# EAGLE board HV_SNS_V0.1 (EAGLE 9.6.2)

Size 160 x 100 mm. Coordinates in mm from the lower left corner, seen from the top.
Outline: 0,0 160,0 160,100 0,100 0,0
Copper layers (1*16): Top 0.035mm / dielectric 1.5mm / Bottom 0.035mm
Design rules "default": minimum track width 8mil, minimum drill 0.35mm, track to track 6mil, track to pad 6mil, pad to pad 6mil, via to via 6mil, smd to smd 6mil, copper to edge 40mil, drill to drill 6mil, minimum pad ring 10mil, minimum via ring 8mil, stop-mask expansion 4mil, vias tented up to drill 15mil, thermal gap 10mil

## Footprints (pad centres in the part's own frame; a part is rotated, then mirrored left to right if it is on the bottom)
C0805 = smd 1.3 x 1.5: 1 -0.95,0; 2 0.95,0
DO-41 = drill 1: A 4.325,0 | drill 1 square: C -4.325,0
DO35Z10 = drill 0.813 long: A 5.08,0; C -5.08,0
SMT-JUMPER_2_NC_PASTE_SILK = smd 0.635 x 1.27: 1 -0.406,0; 2 0.406,0
LED5MM = drill 0.813 pad 1.676 octagon: A -1.27,0; K 1.27,0
CHIP-LED0805 = smd 1.2 x 1.2: A 0,-1.05; C 0,1.05
DIL04 = drill 0.813 offset: 1 -1.27,-3.81; 2 1.27,-3.81; 3 1.27,3.81; 4 -1.27,3.81
SOT23 = smd 1 x 1.4: 1 -0.95,-1.1; 2 0.95,-1.1; 3 0,1.1
R0805 = smd 1.3 x 1.5: 1 -0.95,0; 2 0.95,0
0207/10 = drill 0.813 octagon: 1 -5.08,0; 2 5.08,0
RTRIM3296W = drill 0.61: 1 0,-2.54; 2 0,0; 3 0,2.54
PMX42_DPAK = smd 1.6 x 2.997: 1 -2.261,-4.928; 3 2.21,-4.928 | smd 5.452 x 7: 4 0,1.853
SO-8 = smd 1.524 x 0.61: 1 -2.743,1.905; 2 -2.743,0.635; 3 -2.743,-0.635; 4 -2.743,-1.905; 5 2.743,-1.905; 6 2.743,-0.635; 7 2.743,0.635; 8 2.743,1.905
PHOENIX_MKDS1/2-3.81 = drill 1.1 octagon: 1 -1.906,-0.05; 2 1.904,-0.05

## Placement (x,y rotation side)
C10  1u  [C0805]  43.94,86.74 180 top
C50  1u  [C0805]  86.36,95.25 180 top
D3  1N4007  [DO-41]  26.42,79.38 0 top
D4  1N4007  [DO-41]  26.42,90.42 0 top
D20  BZX55  [DO35Z10]  26.67,54.61 180 top
D21  BZX55  [DO35Z10]  40.64,54.61 180 top
D90  BZX55  [DO35Z10]  -34.29,64.77 0 top  (outside the outline)
D91  BZX55  [DO35Z10]  -48.26,64.77 0 top  (outside the outline)
JP70  JUMPER-SMT_2_NC_PASTE_SILK  [SMT-JUMPER_2_NC_PASTE_SILK]  -57.15,82.55 0 top  (outside the outline)
JP80  JUMPER-SMT_2_NC_PASTE_SILK  [SMT-JUMPER_2_NC_PASTE_SILK]  -71.12,82.55 0 top  (outside the outline)
LED20  [LED5MM]  52.07,55.88 270 top
LED21  [LED5MM]  59.69,55.88 270 top
LED22  [LED5MM]  67.31,55.88 270 top
LED23  [LED5MM]  74.93,55.88 270 top
LED100  [CHIP-LED0805]  -26.67,46.99 0 top  (outside the outline)
OK60  PC817  [DIL04]  105.54,85.72 270 top
OK90  PC817  [DIL04]  105.41,71.12 270 top
Q60  SI2302  [SOT23]  121.28,86.11 270 top
Q70  SI2302  [SOT23]  -52.07,58.42 0 top  (outside the outline)
Q80  SI2302  [SOT23]  -59.69,58.42 0 top  (outside the outline)
Q90  SI2302  [SOT23]  -67.31,58.42 0 top  (outside the outline)
R10  18K2  [R0805]  37.21,83.19 0 top
R11  6K04  [R0805]  43.94,83.19 0 top
R20  12K  [0207/10]  25.91,67.94 0 top
R21  12K  [0207/10]  39.37,67.94 0 top
R22  3K  [0207/10]  52.83,67.94 0 top
R40  400K  [0207/10]  60.96,93.98 0 top
R41  4K7  [0207/10]  60.96,88.9 0 top
R42  1K  [RTRIM3296W]  71.63,91.44 180 top
R43  400K  [0207/10]  61.09,83.19 0 top
R44  4K7  [0207/10]  61.21,78.11 0 top
R45  1K  [RTRIM3296W]  71.63,80.64 180 top
R60  480E  [R0805]  93.85,87 180 top
R61  10K  [R0805]  115.44,88.01 90 top
R70  10K  [R0805]  -22.86,71.12 0 top  (outside the outline)
R80  10K  [R0805]  -29.21,71.12 0 top  (outside the outline)
R90  12K  [0207/10]  26.67,72.39 0 top
R91  12K  [0207/10]  39.37,72.39 0 top
R92  12K  [0207/10]  52.07,72.39 0 top
R93  10K  [R0805]  -35.56,71.12 0 top  (outside the outline)
R100  1K8  [R0805]  -59.69,64.77 0 top  (outside the outline)
U10  LR8K4-G  [PMX42_DPAK]  43.05,91.95 270 top
U50  OPA735AID.  [SO-8]  86.36,87.63 0 top
XA1  MKDS1/2-3.81  [PHOENIX_MKDS1/2-3.81]  12.7,7.62 270 top
XA2  MKDS1/2-3.81  [PHOENIX_MKDS1/2-3.81]  12.83,92.33 270 top
XA3  MKDS1/2-3.81  [PHOENIX_MKDS1/2-3.81]  12.7,81.28 270 top
XA4  MKDS1/2-3.81  [PHOENIX_MKDS1/2-3.81]  12.7,69.85 270 top
XA5  MKDS1/2-3.81  [PHOENIX_MKDS1/2-3.81]  12.7,57.15 270 top
XA6  MKDS1/2-3.81  [PHOENIX_MKDS1/2-3.81]  12.7,33.02 270 top
XA7  MKDS1/2-3.81  [PHOENIX_MKDS1/2-3.81]  12.7,20.32 270 top
XA8  MKDS1/2-3.81  [PHOENIX_MKDS1/2-3.81]  -49.53,22.86 0 top  (outside the outline)
XA9  MKDS1/2-3.81  [PHOENIX_MKDS1/2-3.81]  -63.5,22.86 0 top  (outside the outline)
XA10  MKDS1/2-3.81  [PHOENIX_MKDS1/2-3.81]  -77.47,22.86 0 top  (outside the outline)
XA11  MKDS1/2-3.81  [PHOENIX_MKDS1/2-3.81]  -21.59,38.1 0 top  (outside the outline)

## Library data of the parts
C10 C50 = rcl; SPICEPREFIX: C
D3 D4 = Diodes; CREATED_BY: PCBLayout.com; DIGIKEY_PART_NUMBER: 1N4007MSCT-ND; MANUFACTURER: Micro Commercial Co; MPN: 1N4007; PACKAGE: DO-41
D20 D21 D90 D91 = diode
JP70 JP80 = SparkFun-Jumpers
LED20-LED23 = adafruit
LED100 = led
OK60 OK90 = optocoupler; MPN: PC817X4J000F; OC_FARNELL: 9707727; OC_NEWARK: 97K7059
Q60 Q70 Q80 Q90 = SI230x; AVAILABILITY: Unavailable; DESCRIPTION: N-Channel 20V 2.6A _Ta_ 710mW _Ta_ Surface Mount SOT-23-3 _TO-236_; MF: Vishay Siliconix; MP: SI2302; PACKAGE: SOT-23-3 Vishay Siliconix; PRICE: None
R10 R11 R20-R22 R40 R41 R43 R44 R60 R61 R70 R80 R90-R93 R100 = rcl; SPICEPREFIX: R
R42 R45 = rcl; SPICEMODEL: X; SPICEPREFIXL: POT
U10 = LR8K4-G
U50 = OPA735AID
XA1-XA11 = MKDS1_2-3.81; AVAILABILITY: Unavailable; DESCRIPTION: 12 Position Wire to Board Terminal Block Horizontal with Board 0.150 (3.81mm) Through Hole; MF: Phoenix Contact; MP: MKDS 1/ 2-3.81; PACKAGE: None; PRICE: None

## Nets
AIR_N_AUX1: Q80.1 R80.1 XA7.1
AIR_N_AUX2: JP80.1 XA7.2
AIR_N_LINE: XA5.1
AIR_N_LOAD: D20.A D90.A XA5.2
AIR_N_STATUS: Q80.3 XA11.1
AIR_P_AUX1: Q70.1 R70.1 XA6.1
AIR_P_AUX2: JP70.1 XA6.2
AIR_P_LINE: XA4.1
AIR_P_LOAD: R20.1 R90.1 XA4.2
AIR_P_STATUS: Q70.3 XA10.1
B+: R40.1 U10.1 XA2.1
B-: D4.C R41.1 XA2.2
B_OPAMP: R42.2 U50.3
CMP_OUT: R60.2 U50.6
GND: JP70.2 JP80.2 LED100.C OK60.3 OK90.3 Q60.2 Q70.2 Q80.2 Q90.2 XA1.2 XA9.2 XA10.2 XA11.2
GND-ISO: C50.2 D3.A D4.A OK60.2 R10.1 U50.4
HV_IND_SINK: Q90.3 XA8.2
LR8_REF: C10.2 R10.2 R11.1 U10.3
MC95B_STATUS: Q60.3 XA9.1
MC+: R43.1 XA3.1
MC-: D3.C R44.1 XA3.2
MC_OPAMP: R45.2 U50.2
N$1: D20.C D21.A
N$2: LED20.A LED21.A LED22.A LED23.A R22.2
N$3: D21.C LED20.K LED21.K LED22.K LED23.K
N$4: OK90.4 Q90.1 R93.1
N$5: R43.2 R45.1
N$6: R44.2 R45.3
N$7: R41.2 R42.3
N$8: R40.2 R42.1
N$9: OK60.1 R60.1
N$10: OK60.4 Q60.1 R61.1
N$11: R20.2 R21.1
N$12: R21.2 R22.1
N$13: OK90.1 R92.2
N$14: R91.2 R92.1
N$15: R90.2 R91.1
N$16: D91.C OK90.2
N$17: D90.C D91.A
N$18: LED100.A R100.2
VCC: R61.2 R70.2 R80.2 R93.2 R100.1 XA1.1 XA8.1
VCC-ISO: C10.1 C50.1 R11.2 U10.4 U50.7

## Tracks (layer width: path | path; a pad name or v marks a point on that pad's centre or on a via)
AIR_N_AUX1  (2 unrouted)
AIR_N_AUX2  (1 unrouted)
AIR_N_LOAD  (2 unrouted)
AIR_N_STATUS  (1 unrouted)
AIR_P_AUX1  (2 unrouted)
AIR_P_AUX2  (1 unrouted)
AIR_P_LOAD  (2 unrouted)
AIR_P_STATUS  (1 unrouted)
B+  (2 unrouted)
B-  (2 unrouted)
B_OPAMP  (1 unrouted)
CMP_OUT  (1 unrouted)
GND  (12 unrouted)
GND-ISO  (5 unrouted)
HV_IND_SINK  (1 unrouted)
LR8_REF  (3 unrouted)
MC95B_STATUS  (1 unrouted)
MC+  (1 unrouted)
MC-  (2 unrouted)
MC_OPAMP  (1 unrouted)
N$1  (1 unrouted)
N$2  (4 unrouted)
N$3  (4 unrouted)
N$4  (2 unrouted)
N$5  (1 unrouted)
N$6  (1 unrouted)
N$7  (1 unrouted)
N$8  (1 unrouted)
N$9  (1 unrouted)
N$10  (2 unrouted)
N$11  (1 unrouted)
N$12  (1 unrouted)
N$13  (1 unrouted)
N$14  (1 unrouted)
N$15  (1 unrouted)
N$16  (1 unrouted)
N$17  (1 unrouted)
N$18  (1 unrouted)
VCC  (6 unrouted)
VCC-ISO  (4 unrouted)
(copper drawn outside any net)
  shapes: Top area x2